# Altium PCB PCB2.PcbDoc
Units mil, origin at the board's own origin, x right, y up, seen from the top; angles counter-clockwise.
Board outline 6000 x 4000 mil, 2 copper layers (Top Layer, Bottom Layer); 17 components, 8 nets, 85 pads, 0 vias.
Unrouted connection lines stored in the file: 10.
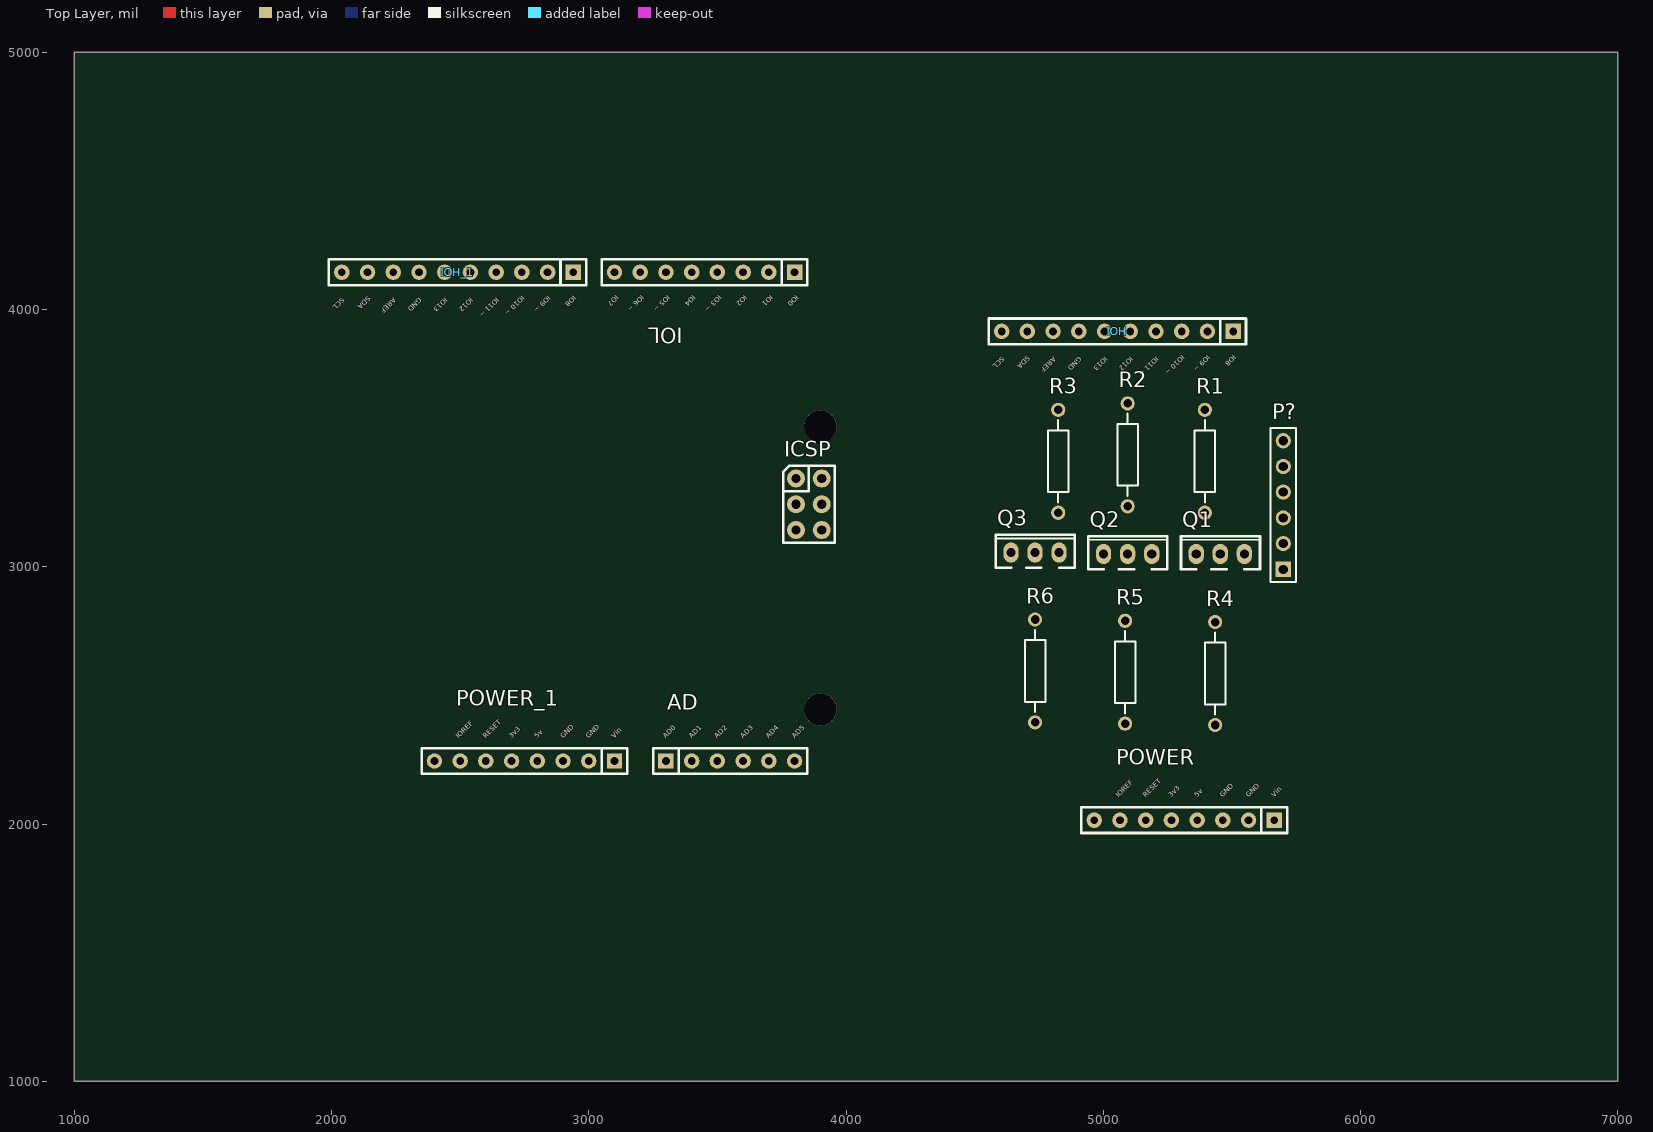
[diagram p0: Top Layer view]
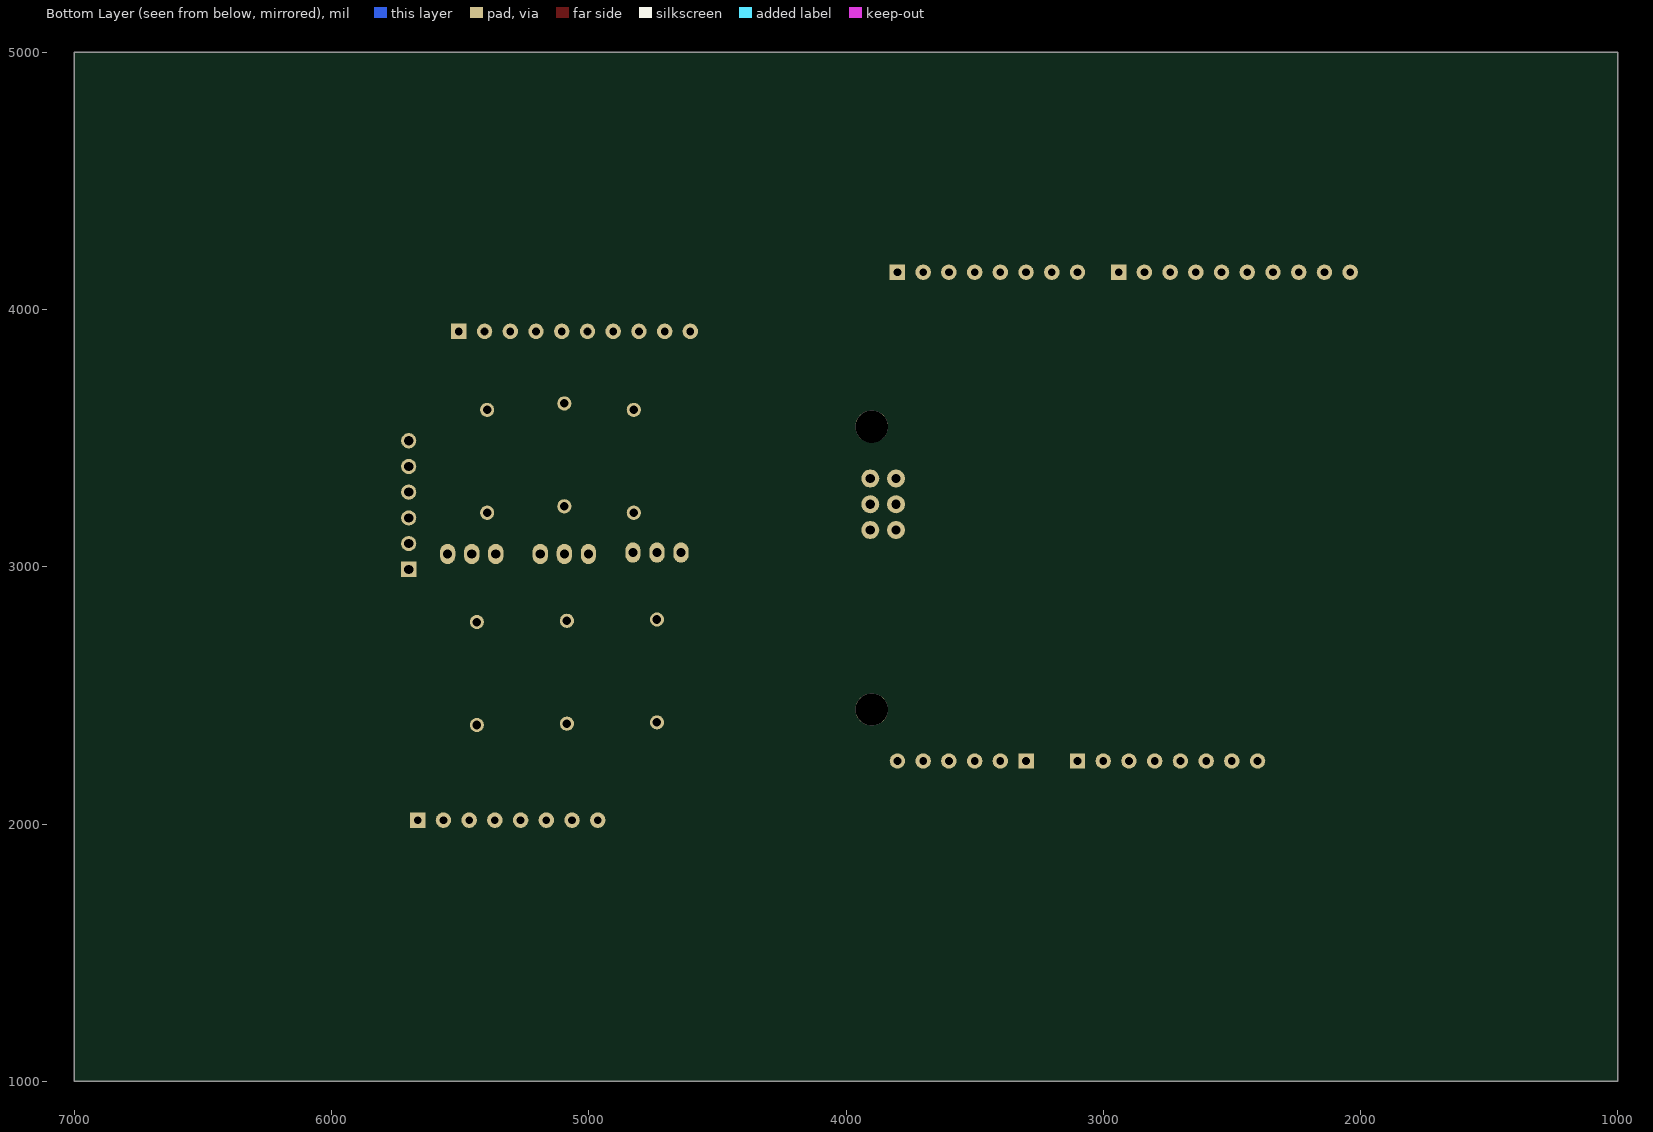
[diagram p1: Bottom Layer view, seen from below]

## Layer stack, top to bottom
Top Solder: solder mask 0.4, Solder Resist, Dk 3.5
Top Layer: signal copper 1.4
Dielectric 1: dielectric 12.6, FR-4, Dk 4.8
Bottom Layer: signal copper 1.4
Bottom Solder: solder mask 0.4, Solder Resist, Dk 3.5

## Board outline
1000,1000 7000,1000 7000,5000 1000,5000

## Design rules (kind name [scope] priority, off if disabled: settings)
Clearance [All] p1: gap=10 ignorepadtopadclearanceinfootprint=FALSE except(0: Arc-Hole Track-Hole SMDPad-Hole THPad-Hole Via-Hole Fill-Hole Poly-Hole Region-Hole Text-Hole)
PolygonConnect [All] p1: connectstyle=Relief reliefconductorwidth=10 reliefentries=4 polygonreliefangle="90 Angle" airgapwidth=10
RoutingVias [All] p1: holewidth=28 width=50 viastyle="Through Hole" minholewidth=28 minwidth=50 maxholewidth=28 maxwidth=50
SolderMaskExpansion [All] p1: expansion=4
Width [All] p1: maxlimit=10 minlimit=10 preferedwidth=10
30 further rules are at their usual default settings.

## Classes and differential pairs
component class Olfactometer: P? Q1 Q2 Q3 R1 R2 R3 R4 R5 R6

## Components (designator, comment, footprint, x,y, rotation, side; value= is the part's Value field where it differs from the comment)
AD "AD" "Header 6x1 8.5mm" 3300,2245 r0 top locked
ICSP "ICSP" ICSP 3805.51,3343.03 r0 top locked
IOH "IOH" "Header 10x1 8.5mm" 5505,3915 r180 top locked
IOH_1 "IOH" "Header 10x1 8.5mm" 2940,4145 r180 top locked (schematic designator IOH)
IOL "IOL" "Header 8x1 8.5mm" 3800,4145 r180 top locked
P? "Header 6" HDR1X6 5700,2990 r90 top
POWER "POWER_UNO" "Header 8x1 8.5mm" 5665,2015 r180 top
POWER_1 "POWER_UNO" "Header 8x1 8.5mm" 3100,2245 r180 top locked (schematic designator POWER)
Q1 "BD139" SOT-32 5302.44,2990.94 r0 top
Q2 "BD139" SOT-32 4942.44,2990.94 r0 top
Q3 "BD139" SOT-32 4582.44,2995.94 r0 top
R1 "Res2" AXIAL-0.4 5395,3410 r270 top value=1K
R2 "Res2" AXIAL-0.4 5095,3435 r270 top value=1K
R3 "Res2" AXIAL-0.4 4825,3410 r270 top value=1K
R4 "Res2" AXIAL-0.4 5435,2585 r270 top value=1K
R5 "Res2" AXIAL-0.4 5085,2590 r270 top value=1K
R6 "Res2" AXIAL-0.4 4735,2595 r270 top value=1K

## Footprints (in the part's own frame and the unit in brackets; to place one, negate y for a bottom-side part, rotate by r counter-clockwise, add the part's x,y. Pads: shape width x height; smd on the part's side, far side on the other; paste and mask are expansions set on the pad)
AXIAL-0.4 [mm] "Axial Device, Thru-Hole; 2 Leads; 0.4 in Pin Spacing"
  round 1.4 hole 0.85: 1(-5.08,0) 2(5.08,0)
  silkscreen extent -4.06,-1.02 4.06,1.02
HDR1X6 [mm] "Connector; Header; 6 Position"
  rect 1.5x1.5 hole 0.9: 1(0,0)
  round 1.5 hole 0.9: 2(2.54,0) 3(5.08,0) 4(7.62,0) 5(10.16,0) 6(12.7,0)
  silkscreen extent -1.27,-1.27 13.97,1.27
"Header 6x1 8.5mm" [mil] "Stackable 6 pin header"
  rect 60x60 hole 30: 1(0,0)
  round 60 hole 30: 2(100,0) 3(200,0) 4(300,0) 5(400,0) 6(500,0)
  silkscreen extent -50,-50 550,50, body extent -50,-50 550,50, height 335
"Header 8x1 8.5mm" [mil] "Stackable 8 pin header"
  rect 60x60 hole 30: 1(0,0)
  round 60 hole 30: 2(100,0) 3(200,0) 4(300,0) 5(400,0) 6(500,0) 7(600,0) 8(700,0)
  silkscreen extent -50,-50 750,50, body extent -50,-50 750,50, height 335
"Header 10x1 8.5mm" [mil] "Stackable 10 pin header"
  rect 60x60 hole 30: 1(0,0)
  round 60 hole 30: 2(100,0) 3(200,0) 4(300,0) 5(400,0) 6(500,0) 7(600,0) 8(700,0) 9(800,0) 10(900,0)
  silkscreen extent -50,-50 950,50, body extent -50,-50 950,50, height 335
ICSP [mil]
  round 70 hole 35.43: 1(0,0) 2(100,0) 3(0,-100) 4(100,-100) 5(0,-200) 6(100,-200)
  silkscreen extent -50,-250 150,50, body extent -50,-250 150,50, height 485
SOT-32 [mm]
  oval 1.5x2 hole 0.9: B(6.25,1.5) C(3.875,1.5) E(1.5,1.5)
  silkscreen extent 0,0 7.8,3.25

## Part data
P?: "Header, 6-Pin", LatestRevisionDate=17-Jul-2002, LatestRevisionNote="Re-released for DXP Platform.", Publisher="Altium Limited"
Q1 Q2 Q3: "NPN Transistor", De="Seyed Mohsen Ghasemian", E-mail=picpars@gmail.com, web=www.picpars.com
R1 R2 R3 R4 R5 R6: "Resistor", LatestRevisionDate=17-Jul-2002, LatestRevisionNote="Re-released for DXP Platform.", PackageDescription="Axial Device, Thru-Hole; 2 Leads; 0.4 in Pin Spacing", PackageReference=AXIAL-0.4, Published=8-Jun-2000, Publisher="Altium Limited"

## Free pads (board coordinates)
  round 125.98 hole 125.98: 0(3900,2445) 0(3900,3545)

## Nets (pads, with @x,y where several pads share a name; then routed paths per layer and width w, separated by ;. In a path a pad name is that pad's centre, name@x,y a point inside that pad or via, vN(x,y) a via of type N, cw(c..) or ccw(c..) an arc to the next point about the centre after c; other vN are vias at no path point)
NetQ1_B: Q1.B R1.2
NetQ1_C: Q1.C R4.1
NetQ1_E: Q1.E Q2.E Q3.E
NetQ2_B: Q2.B R2.2
NetQ2_C: Q2.C R5.1
NetQ3_B: Q3.B R3.2
NetQ3_C: Q3.C R6.1
NetR4_2: R4.2 R5.2 R6.2
pads on no net: AD.1 AD.2 AD.3 AD.4 AD.5 AD.6 ICSP.1 ICSP.2 ICSP.3 ICSP.4 ICSP.5 ICSP.6 IOH.1 IOH.2 IOH.3 IOH.4 IOH.5 IOH.6 IOH.7 IOH.8 IOH.9 IOH.10 IOH_1.1 IOH_1.2 IOH_1.3 IOH_1.4 IOH_1.5 IOH_1.6 IOH_1.7 IOH_1.8 IOH_1.9 IOH_1.10 IOL.1 IOL.2 IOL.3 IOL.4 IOL.5 IOL.6 IOL.7 IOL.8 P?.1 P?.2 P?.3 P?.4 P?.5 P?.6 POWER.1 POWER.2 POWER.3 POWER.4 POWER.5 POWER.6 POWER.7 POWER.8 POWER_1.1 POWER_1.2 POWER_1.3 POWER_1.4 POWER_1.5 POWER_1.6 POWER_1.7 POWER_1.8 R1.1 R2.1 R3.1

## Silkscreen, mask and mechanical layers (free items; w line width, h text height)
Top Overlay:
  text "IO7" at 3105,4057.93 h20 r225
  text "IO6 ~" at 3205,4057.93 h20 r225
  text "IO5 ~" at 3305,4057.93 h20 r225
  text "IO4" at 3405,4057.93 h20 r225
  text "IO3 ~" at 3505,4057.93 h20 r225
  text "IO2" at 3605,4057.93 h20 r225
  text "IO1" at 3705,4057.93 h20 r225
  text "IO0" at 3805,4057.93 h20 r225
  text "IO10 ~" at 2740,4055 h20 r225
  text "IO9 ~" at 2840,4055 h20 r225
  text "IO8" at 2940,4055 h20 r225
  text "SDA" at 2140,4052.93 h20 r225
  text "SCL" at 2040,4047.93 h20 r225
  text "AREF" at 2240,4047.93 h20 r225
  text "GND" at 2340,4047.93 h20 r225
  text "IO13" at 2440,4047.93 h20 r225
  text "IO12" at 2540,4047.93 h20 r225
  text "IO11 ~" at 2640,4047.93 h20 r225
  text "IO10 ~" at 5305,3825 h20 r225
  text "IO9 ~" at 5405,3825 h20 r225
  text "IO8" at 5505,3825 h20 r225
  text "SDA" at 4705,3822.93 h20 r225
  text "SCL" at 4605,3817.93 h20 r225
  text "AREF" at 4805,3817.93 h20 r225
  text "GND" at 4905,3817.93 h20 r225
  text "IO13" at 5005,3817.93 h20 r225
  text "IO12" at 5105,3817.93 h20 r225
  text "IO11 ~" at 5205,3817.93 h20 r225
  text "IOREF" at 2495,2332.07 h20 r45
  text "RESET" at 2600,2332.07 h20 r45
  text "3v3" at 2700,2332.07 h20 r45
  text "5v" at 2800,2332.07 h20 r45
  text "GND" at 2900,2332.07 h20 r45
  text "GND" at 3000,2332.07 h20 r45
  text "Vin" at 3100,2332.07 h20 r45
  text "AD0" at 3300,2332.07 h20 r45
  text "AD1" at 3400,2332.07 h20 r45
  text "AD2" at 3500,2332.07 h20 r45
  text "AD3" at 3600,2332.07 h20 r45
  text "AD4" at 3700,2332.07 h20 r45
  text "AD5" at 3800,2332.07 h20 r45
  text "IOREF" at 5060,2102.07 h20 r45
  text "RESET" at 5165,2102.07 h20 r45
  text "3v3" at 5265,2102.07 h20 r45
  text "5v" at 5365,2102.07 h20 r45
  text "GND" at 5465,2102.07 h20 r45
  text "GND" at 5565,2102.07 h20 r45
  text "Vin" at 5665,2102.07 h20 r45
Mechanical 1:
  circle w5: c3900,2445 r62.99
  circle w5: c3900,3545 r62.99
  lines w5: 3800,4245 3900,4145 3900,3745 4000,3645 4000,2295 3900,2195 3900,2145 ; 6620,-190 6620,-140 6720,-40
  lines w10: 4420,4025 5775,4025 5780,4020 5780,1890 5770,1900 4420,1900 4420,4060